# Altium PCB LIN_break2.PcbDoc
Units mm, origin at the board's own origin, x right, y up, seen from the top; angles counter-clockwise.
Board outline 30 x 50 mm, 2 copper layers (L1, L2), stack 0.93 mm thick; 26 components, 21 nets, 113 pads, 31 vias.
Unrouted connection lines stored in the file: 5.
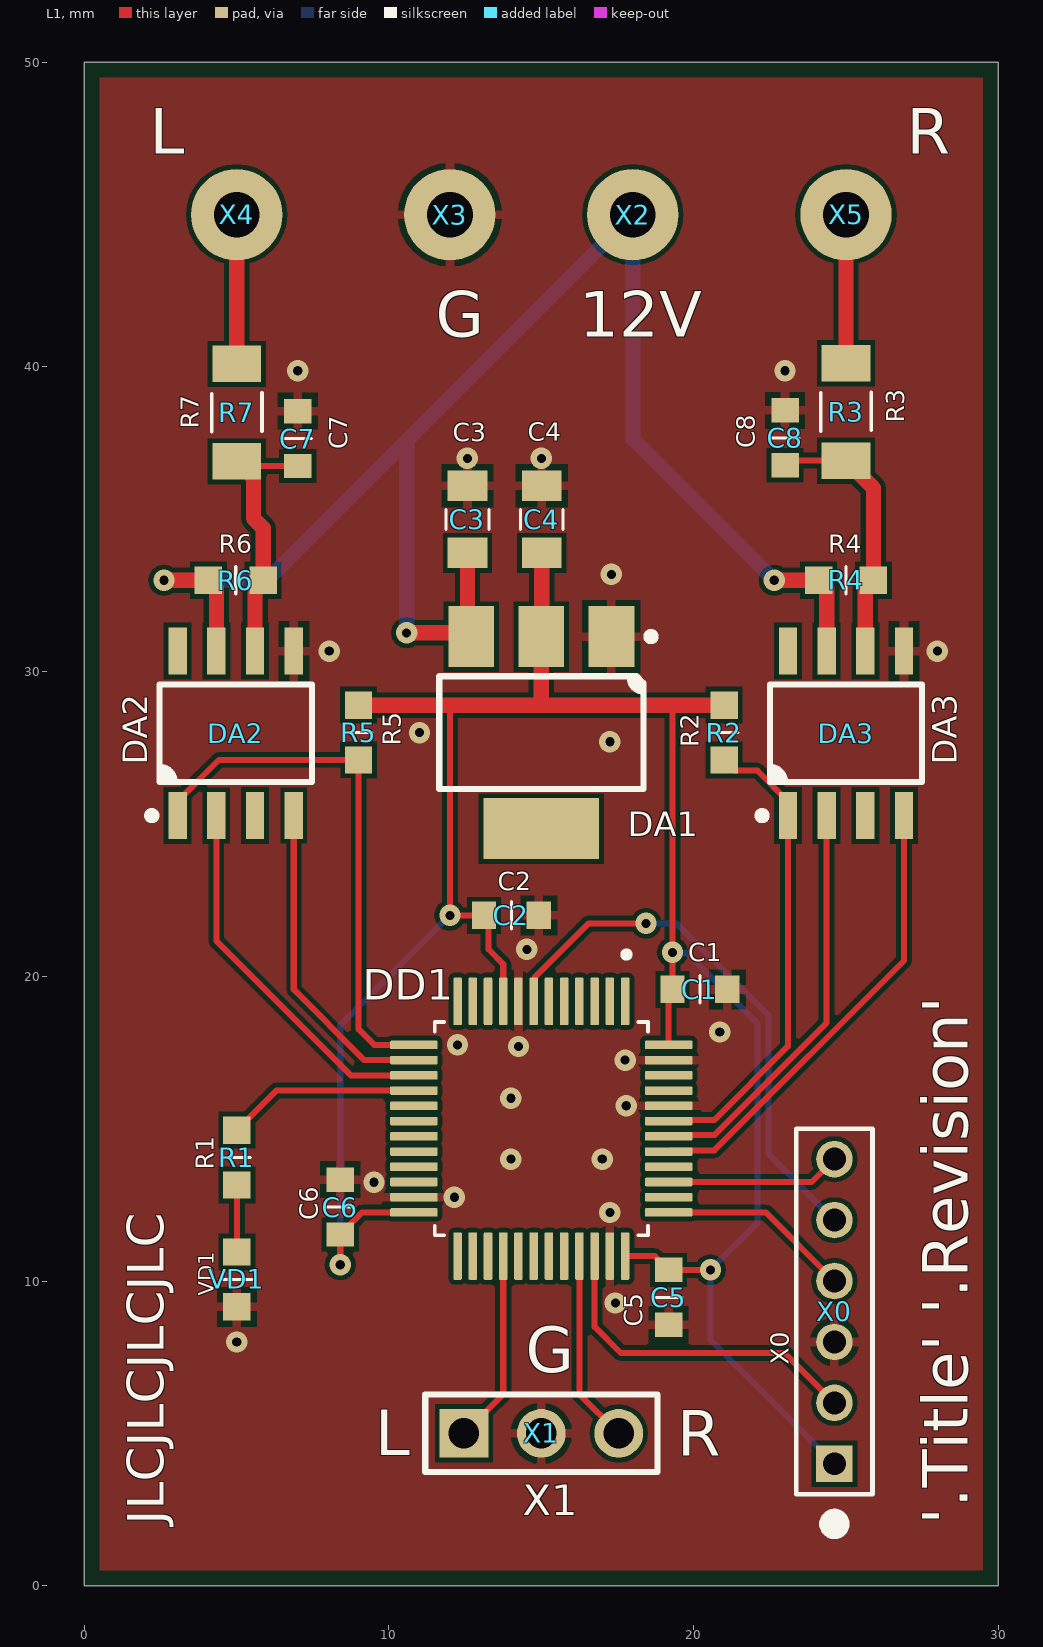
[diagram p0: L1 view]
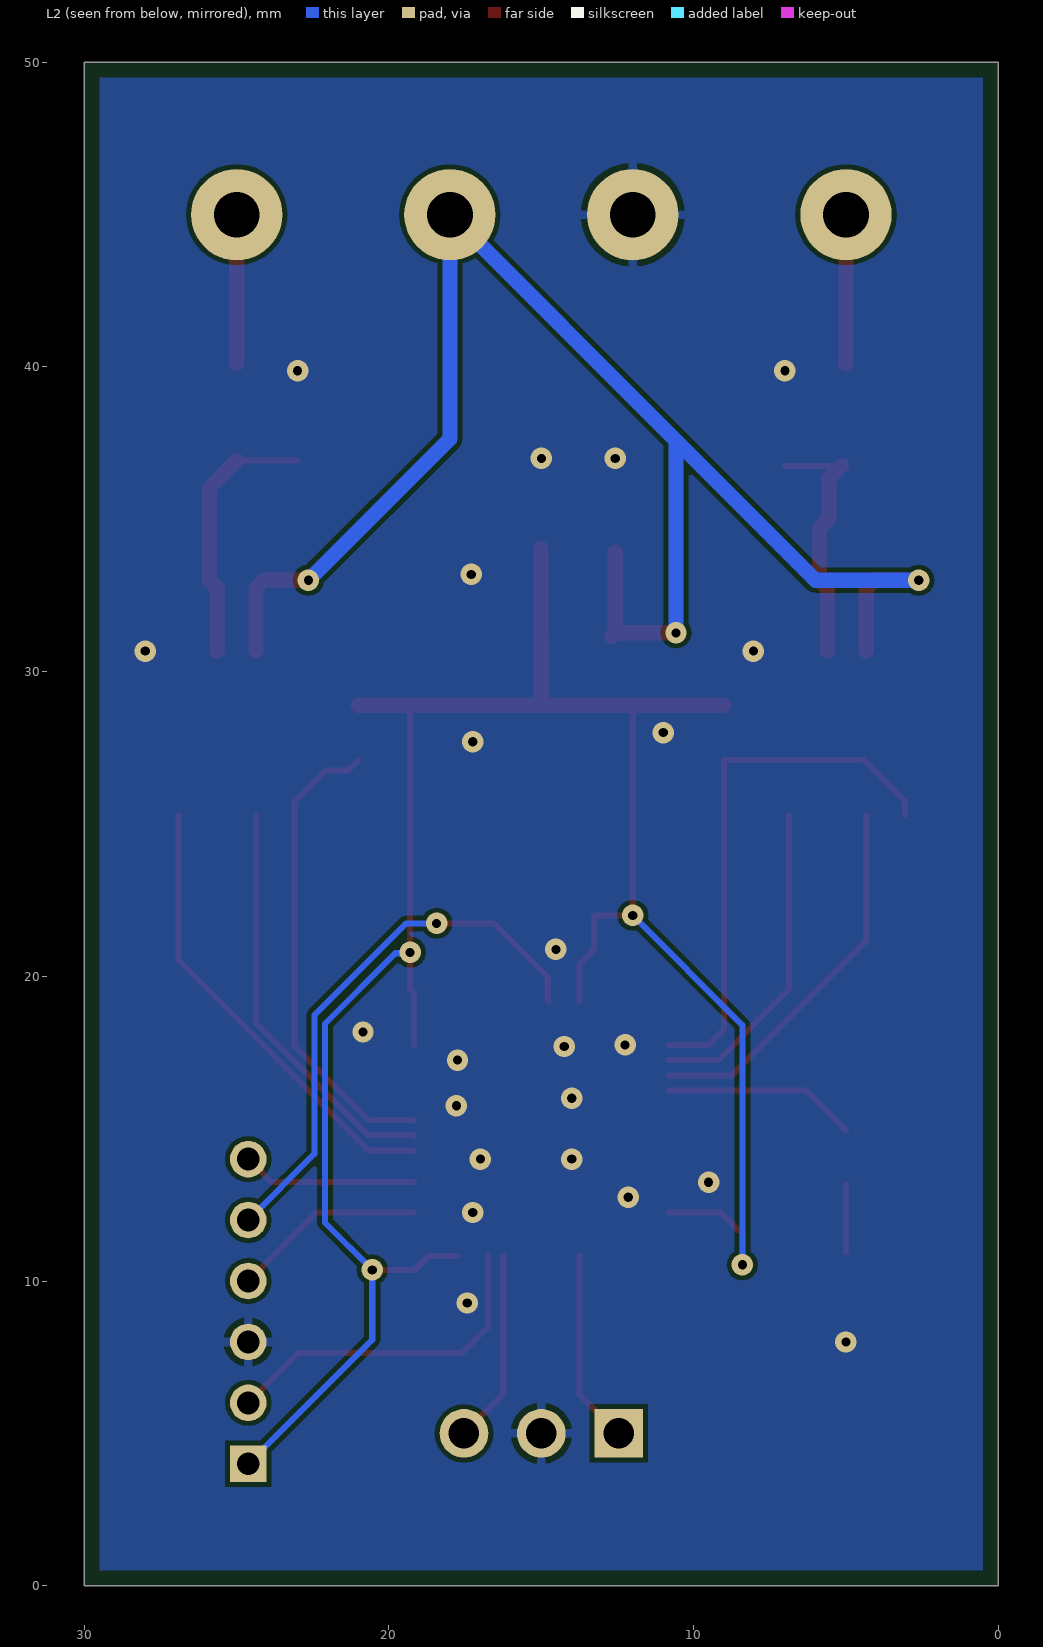
[diagram p1: L2 view, seen from below]
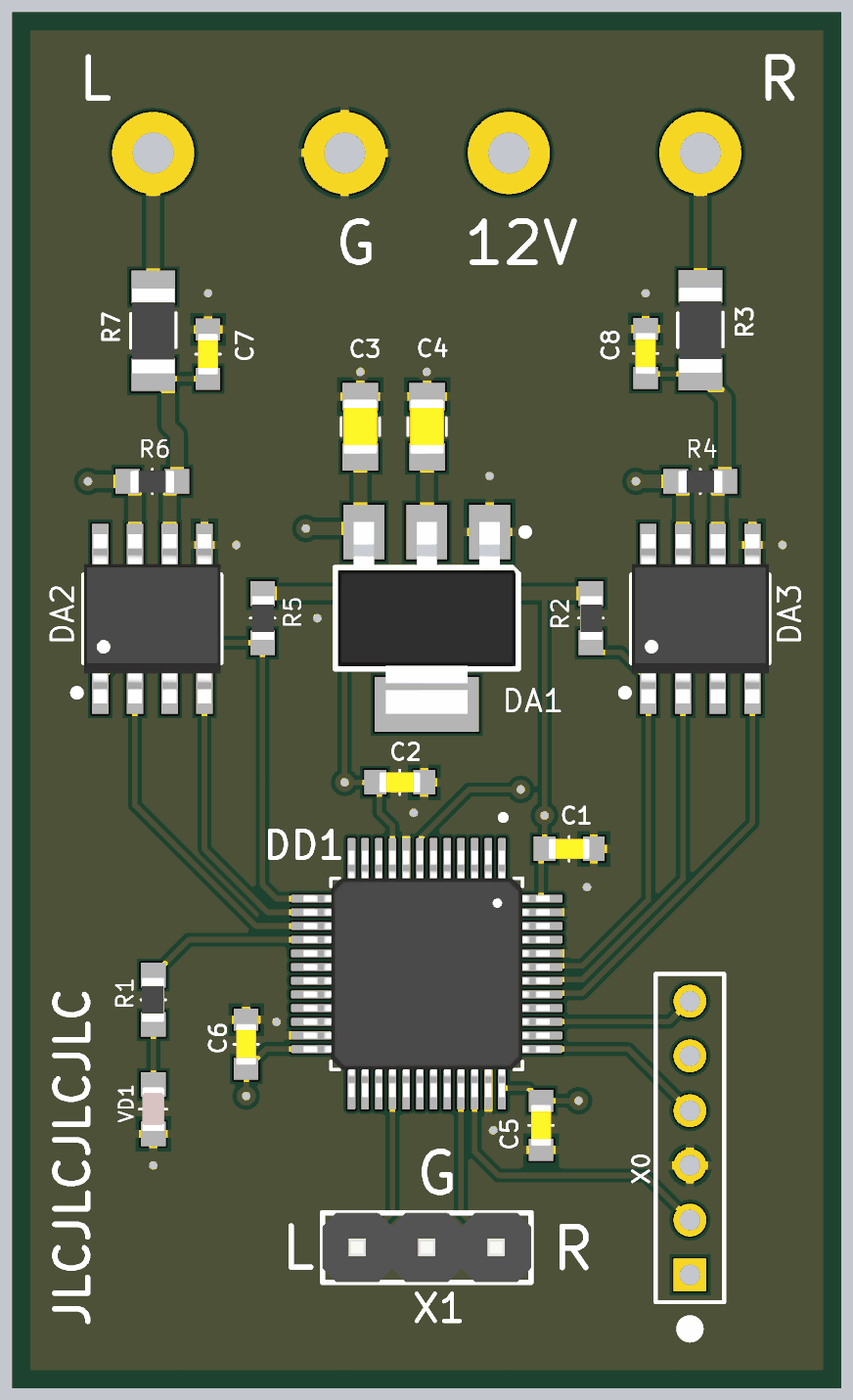
[diagram p2: 3D render of the assembled board from above, using the file's embedded part models]

## Layer stack, top to bottom
Top Solder: solder mask 0.03, Solder Resist, Dk 3.5
L1: signal copper 0.015
Core: core 0.9, FR-4, Dk 4.2
L2: signal copper 0.015
Bot Solder: solder mask 0.03, Solder Resist, Dk 3.5

## Board outline
0,0 0,50 30,50 30,0

## Design rules (kind name [scope] priority, off if disabled: settings)
BoardOutlineClearance KeepoutBoardOutline [(ObjectKind = 'Track') And (Keepout = 'True')] p1: gap=0 ignorepadtopadclearanceinfootprint=FALSE
BoardOutlineClearance IDC-20F [HasFootprint('IDC-20F-EDGE')] p2: gap=0 ignorepadtopadclearanceinfootprint=FALSE
BoardOutlineClearance BoardOutlineClearanceAll [All] p3: gap=0.5 ignorepadtopadclearanceinfootprint=FALSE
Clearance ClearanceNetA1_1 [InNet('NetA1_1')] p1 off: gap=0.15 ignorepadtopadclearanceinfootprint=FALSE except(0.2: Arc-Fill Arc-Poly Arc-Region Track-Fill Track-Poly Track-Region)
Clearance ClearanceTopSilk [OnLayer('Top Silk') vs OnLayer('L1')] p2: gap=0.15 ignorepadtopadclearanceinfootprint=FALSE except(0: Arc-Hole Track-Hole SMDPad-Hole THPad-Hole Via-Hole Fill-Hole Poly-Hole Region-Hole Text-Hole)
Clearance ClearanceBalun [HasFootprint('BALF-NRG-01D3')] p3: gap=0.1 ignorepadtopadclearanceinfootprint=FALSE except(0: Arc-Hole Track-Hole SMDPad-Hole THPad-Hole Via-Hole Fill-Hole Poly-Hole Region-Hole Text-Hole) // BALF-NRG-01D3
Clearance ClearanceBalun_CC112X [HasFootprint('BALF-112X-01D3')] p4: gap=0.1 ignorepadtopadclearanceinfootprint=FALSE except(0: Arc-Hole Track-Hole SMDPad-Hole THPad-Hole Via-Hole Fill-Hole Poly-Hole Region-Hole Text-Hole) // BALF-NRG-01D3
Clearance ClearancePolygonANT [InNet('ANT') vs InPoly] p5: gap=0.45 ignorepadtopadclearanceinfootprint=FALSE except(0: Arc-Hole Track-Hole SMDPad-Hole THPad-Hole Via-Hole Fill-Hole Poly-Hole Region-Hole Text-Hole)
Clearance Wire_Jumpers [HasFootprint('WIRE')] p6: gap=0.01 ignorepadtopadclearanceinfootprint=FALSE except(0: Arc-Hole Track-Hole SMDPad-Hole THPad-Hole Via-Hole Fill-Hole Poly-Hole Region-Hole Text-Hole) // Pour over wire jumpers
Clearance VD [All vs HasFootprint('DPF(S-PX2SON-N6)')] p7: gap=0.1 ignorepadtopadclearanceinfootprint=FALSE except(0: Arc-Hole Track-Hole SMDPad-Hole THPad-Hole Via-Hole Fill-Hole Poly-Hole Region-Hole Text-Hole) // For small diods (ECD protection)
Clearance L1 [OnLayer('L1')] p8: gap=0.15 ignorepadtopadclearanceinfootprint=FALSE except(0: Arc-Hole Track-Hole SMDPad-Hole THPad-Hole Via-Hole Fill-Hole Poly-Hole Region-Hole Text-Hole)
Clearance L2 [OnLayer('L2')] p9: gap=0.15 ignorepadtopadclearanceinfootprint=FALSE except(0: Arc-Hole Track-Hole SMDPad-Hole THPad-Hole Via-Hole Fill-Hole Poly-Hole Region-Hole Text-Hole)
ComponentClearance PowerConnector [(ObjectKind = '3D Body') And (Identifier = '039012040')] p1: gap=0 collisioncheckmode=3 verticalgap=0 showdistances=FALSE
ComponentClearance MezzanineConnectors [InComponent('X7') or InComponent('X8') vs (ObjectKind = '3D Body') And (Identifier = 'mezzanine')] p2: gap=0 collisioncheckmode=3 verticalgap=0 showdistances=FALSE
ComponentClearance [(ObjectKind = '3D Body') And (Identifier = '039012040')] p3: gap=0 collisioncheckmode=3 verticalgap=0 showdistances=TRUE
ComponentOrientations [All] p1: allowedrotations=32
DiffPairsRouting [All] p1: maxlimit=0.4 minlimit=0.4 mostfreqgap=0.4 toplayer_minwidth=0.15 toplayer_maxwidth=0.3 toplayer_prefwidth=0.3 bottomlayer_minwidth=0.15 bottomlayer_maxwidth=0.3 bottomlayer_prefwidth=0.3 maxuncoupledlength=12.7
HoleSize [All] p1: absolutevalues=TRUE maxlimit=3 minlimit=0.3 maxpercent=80.000 minpercent=20.000
HoleToHoleClearance [All] p1: gap=0.1 allowstackedmicrovias=TRUE
MatchedLengths USB2 [InNetClass('USB2')] p1: tolerance=1 checknetsindiffpair=TRUE checkdiffpairvsdiffpair=FALSE checkxsignals=FALSE checkothers=FALSE
MatchedLengths USB1 [InNetClass('USB1')] p2: tolerance=1 checknetsindiffpair=TRUE checkdiffpairvsdiffpair=FALSE checkxsignals=FALSE checkothers=FALSE
MatchedLengths BLE_SPI [InNetClass('BLE_SPI')] p3: tolerance=1 checknetsindiffpair=TRUE checkdiffpairvsdiffpair=FALSE checkxsignals=FALSE checkothers=FALSE
MatchedLengths ACEEL_SPI [InNetClass('ACC_SPI')] p4: tolerance=1 checknetsindiffpair=TRUE checkdiffpairvsdiffpair=FALSE checkxsignals=FALSE checkothers=FALSE
MatchedLengths DEBUG_Lengths [InNetClass('DEBUG')] p5: tolerance=1 checknetsindiffpair=TRUE checkdiffpairvsdiffpair=FALSE checkxsignals=FALSE checkothers=FALSE
MinimumAnnularRing MinimumAnnularRing_1 [(ObjectKind = 'Via') And (AsMM(PadXSize_TopLayer) = 0.4)] p1: minimumring=0
MinimumAnnularRing [(ObjectKind = 'Via') And (AsMM(PadXSize_TopLayer) <> 0.4)] p2: minimumring=0.2
MinimumSolderMaskSliver [All] p1 off: minsoldermaskwidth=0.148
NetAntennae Keepout [(ObjectKind = 'Track') And (Keepout = 'True')] p1: netantennaetolerance=100
PlaneClearance [All] p1: clearance=0.15
PlaneConnect [All] p1: planeconnectstyle=Relief reliefexpansion=0.5 reliefentries=4 reliefconductorwidth=0.25 reliefairgap=0.15
PolygonConnect PolygonConnect_Vias [(ObjectKind = 'Via')] p1: connectstyle=Direct reliefconductorwidth=0.254 reliefentries=4 polygonreliefangle="90 Angle" airgapwidth=0.254
PolygonConnect PolygonConnect_L2 [OnLayer('L2')] p2: connectstyle=Relief reliefconductorwidth=0.3 reliefentries=4 polygonreliefangle="90 Angle" airgapwidth=0.2
PolygonConnect PolygonConnect_L1 [OnLayer('L1')] p3: connectstyle=Relief reliefconductorwidth=0.3 reliefentries=4 polygonreliefangle="90 Angle" airgapwidth=0.2
RoutingCorners [All] p1: cornerstyle=45-Degree minsetback=2.5 maxsetback=2.5
RoutingVias [All] p1: holewidth=0.3 width=0.7 viastyle="Through Hole" minholewidth=0.3 minwidth=0.4 maxholewidth=0.3 maxwidth=0.7
SMDEntry [All] p1: side=TRUE corner=TRUE anyangle=TRUE
SMDToCorner [All] p1: distance=0
SMDToPlane [All] p1: distance=0
ShortCircuit NoNet [Not InAnyNet vs Not InAnyNet] p1: allowed=TRUE
SilkToSilkClearance [All] p1: silktosilkclearance=0
SilkToSolderMaskClearance [IsPad] p1: minsilkscreentomaskgap=0.02 clearancetoexposedcopper=TRUE
SolderMaskExpansion SolderMaskExpansion_Edge [OnLayer('Board')] p1: expansion=0.5 istentingtop=FALSE
SolderMaskExpansion SolderMaskKeepOut [OnLayer('Keepout')] p2: expansion=0.25 istentingtop=FALSE
SolderMaskExpansion [All] p3: expansion=0.075 istentingtop=FALSE
UnRoutedNet "Without GNDs" [not InNetClass('GND')] p1:
UnRoutedNet [All] p2 off:
Width "VD ESD" [InComponent('VD1')] p1: maxlimit=0.1 minlimit=0.1 preferedwidth=0.1
Width Width_GNDB [InNet('GNDB')] p2: maxlimit=0.254 minlimit=0.23 preferedwidth=0.23
Width Width_+V_BLE [InNet('+V_BLE')] p3: maxlimit=0.3 minlimit=0.23 preferedwidth=0.23
Width Width_GND [InNetClass('GND')] p4: maxlimit=5 minlimit=0.15 preferedwidth=0.3
Width Width_VDD [InNetClass('POWER')] p5: maxlimit=5 minlimit=0.15 preferedwidth=0.3
Width [All] p6: maxlimit=5 minlimit=0.15 preferedwidth=0.2
17 further rules are at their usual default settings.

## Components (designator, comment, footprint, x,y, rotation, side; value= is the part's Value field where it differs from the comment)
C1 "1u" C0603 20.205,19.569 r0 top
C2 "1u" C0603 14.016,22 r0 top
C3 "10u" C0805 12.575,35 r90 top
C4 "10u" C0805 15.012,35 r90 top
C5 "1u" C0603 19.18,9.465 r270 top
C6 "1u" C0603 8.4,12.427 r90 top
C7 "220p" C0603 7.005,37.65 r90 top
C8 "220p" C0603 23,37.675 r90 top
DA1 "=Value" AMS1117-3.3 15,28 r270 top
DA2 "SN65HVDA195" "TI-SOIC8 D" 4.969,27.975 r90 top value=LIN
DA3 "SN65HVDA195" "TI-SOIC8 D" 25,27.975 r90 top value=LIN
DD1 "STM32F103C4" ST-LQFP48 15,15 r270 top
R1 "1k" R0603 5.005,14.052 r270 top
R2 "10k" R0603 21,28 r90 top
R3 "22" R1206 25,38.525 r90 top
R4 "10k" R0603 25,33 r0 top
R5 "10k" R0603 9,28 r90 top
R6 "10k" R0603 4.969,33 r0 top
R7 "22" R1206 5.005,38.5 r90 top
VD1 "Red" "LTST-C193 RED" 5.005,10.052 r90 top
X0 "STM32_SMT_DEBUG_JLINK" STM32_DEBUG_6x1_2mm_pitch 24.62,4 r90 top value="SWD TH"
X1 "PLS-3" PLS-3 12.46,5 r0 top
X2 "1-pin_round NB" Hole-1-1.6 18,45 r90 top value=Hole-1-1.6
X3 "1-pin_round NB" Hole-1-1.6 12,45 r90 top value=Hole-1-1.6
X4 "1-pin_round NB" Hole-1-1.6 5,45 r180 top value=Hole-1-1.6
X5 "1-pin_round NB" Hole-1-1.6 25,45 r180 top value=Hole-1-1.6

## Footprints (in the part's own frame and the unit in brackets; to place one, negate y for a bottom-side part, rotate by r counter-clockwise, add the part's x,y. Pads: shape width x height; smd on the part's side, far side on the other; paste and mask are expansions set on the pad)
AMS1117-3.3 [mm] "SOT223, 4-Leads, Body 6.50x7.00mm (avg), Pitch 2.30mm, IPC Medium Density"
  rect 2x1.5 smd: 1(-3.15,2.3) 2(-3.15,0) 3(-3.15,-2.3)
  rect 2x3.8 smd: 4(3.15,0)
  silkscreen extent -3.27,-3.35 1.85,3.73, body extent -3.52,-3.25 3.5,3.25, height 1.8
C0603 [mm]
  rect 0.8x0.9 smd: 1(-0.9,0) 2(0.9,0)
  silkscreen extent 0,-0.45 0,0.45, body extent -0.76,-0.38 0.76,0.38, height 0.76
C0805 [mm]
  rect 1x1.3 smd: 1(-1.1,0) 2(1.1,0)
  silkscreen extent -0.33,-0.7 0.33,0.7, body extent -1.02,-0.63 1.02,0.64, height 1.27
Hole-1-1.6 [mm]
  round 3 hole 1.5 mask+0.075: 1(0,0)
"LTST-C193 RED" [mm]
  rect 0.9x0.9 smd: 1(-0.9,0) 2(0.9,0)
  silkscreen extent 0,-0.5 0,0.51, body extent -0.8,-0.4 0.8,0.4, height 0.36
PLS-3 [mm]
  rect 1.6x1.6 hole 1 paste+1 mask+0.1: 1(0,0)
  round 1.6 hole 1 paste+1 mask+0.1: 2(2.54,0) 3(5.08,0)
  silkscreen extent -1.27,-1.27 6.35,1.27, body extent -1.27,-1.27 6.35,1.27, height 8.54
R0603 [mm]
  rect 0.9x0.9 smd: 1(-0.9,0) 2(0.9,0)
  silkscreen extent 0,-0.45 0,0.45, body extent -0.8,-0.42 0.8,0.4, height 0.46
R1206 [mm]
  rect 1.2x1.6 smd: 1(-1.6,0) 2(1.6,0)
  silkscreen extent -0.63,-0.82 0.65,0.82, body extent -1.55,-0.77 1.55,0.78, height 0.55
ST-LQFP48 [mm]
  rrect25% 1.56x0.28 smd: 1(-4.18,2.75) 2(-4.18,2.25) 3(-4.18,1.75) 4(-4.18,1.25) 5(-4.18,0.75) 6(-4.18,0.25) 7(-4.18,-0.25) 8(-4.18,-0.75) 9(-4.18,-1.25) 10(-4.18,-1.75) 11(-4.18,-2.25) 12(-4.18,-2.75) 25(4.18,-2.75) 26(4.18,-2.25) 27(4.18,-1.75) 28(4.18,-1.25) 29(4.18,-0.75) 30(4.18,-0.25) 31(4.18,0.25) 32(4.18,0.75) 33(4.18,1.25) 34(4.18,1.75) 35(4.18,2.25) 36(4.18,2.75)
  rrect25% 0.28x1.56 smd: 13(-2.75,-4.18) 14(-2.25,-4.18) 15(-1.75,-4.18) 16(-1.25,-4.18) 17(-0.75,-4.18) 18(-0.25,-4.18) 19(0.25,-4.18) 20(0.75,-4.18) 21(1.25,-4.18) 22(1.75,-4.18) 23(2.25,-4.18) 24(2.75,-4.18) 37(2.75,4.18) 38(2.25,4.18) 39(1.75,4.18) 40(1.25,4.18) 41(0.75,4.18) 42(0.25,4.18) 43(-0.25,4.18) 44(-0.75,4.18) 45(-1.25,4.18) 46(-1.75,4.18) 47(-2.25,4.18) 48(-2.75,4.18)
  silkscreen extent -5.81,-3.5 3.5,3.5, body extent -4.5,-4.5 4.5,4.5, height 1.66
STM32_DEBUG_6x1_2mm_pitch [mm]
  rect 1.2x1.2 hole 0.75 mask+0.06: 1(0,0)
  round 1.2 hole 0.75 mask+0.06: 2(2,0) 3(4,0) 4(6,0) 5(8,0) 6(10,0)
  silkscreen extent -1,-1.25 11,1.25
"TI-SOIC8 D" [mm]
  rect 1.55x0.6 smd: 1(-2.7,1.905) 2(-2.7,0.635) 3(-2.7,-0.635) 4(-2.7,-1.905) 5(2.7,-1.905) 6(2.7,-0.635) 7(2.7,0.635) 8(2.7,1.905)
  silkscreen extent -2.82,-2.5 1.6,2.88, body extent -3.1,-2.5 3.1,2.5, height 1.76

## Part data
C1 C2 C5 C6: library part "C0603 1u 10V X6S 105°C ±20%", "General  ceramic capacitor", LCSC Part #=C15849, Package=C0603, Part Number=GRM185C81A105ME36#, Temperature=105°C, Tolerance=±20%, Voltage=10V, Component Name="C0603 1u 10V X6S 105°C ±20%", Pins=2, Vendor=Murata
C3 C4: library part "C0805 10u 10V X6S 105°C ±10%", "General  ceramic capacitor", LCSC Part #=C1046, Package=C0805, Part Number=GRM21BC81A106KE18#, Temperature=105°C, Tolerance=±10%, Voltage=10V, Component Name="C0805 10u 10V X6S 105°C ±10%", Pins=2, Vendor=Murata
C7 C8: library part "C0603 220p 100V X7R 125°C ±20%", "General  ceramic capacitor", Dielectric=X7R, Package=C0603, Part Number=GRM188R72A221MA01#, Temperature=125°C, Tolerance=±20%, Voltage=100V, Component Name="C0603 220p 100V X7R 125°C ±20%", HelpURL=https://psearch.en.murata.com/capacitor/result/smd/?pid=GRM188R72A221MA01#, Pins=2, Vendor=Murata
DA1: library part AMS1117-3.3, "LDO ADJ 0.8mA", LCSC Part #=C426566, Package=SOT-223, Component Name=AMS1117-3.3, HelpURL=https://lcsc.com/product-detail/Linear-Voltage-Regulators-LDO_Slkor-SLKORMICRO-Elec-AMS1117-3-3_C426566.html, Part Number=AMS1117-3.3, Pins=4
DA2 DA3: "LIN driver", LCSC Part #=C140290, Package="SOIC – D", Part Number=SN65HVDA195QDRQ1, Component Name=SN65HVDA195, HelpURL=http://www.ti.com/lit/ds/symlink/sn65hvda195-q1.pdf, Pins=8, Vendor=TI
DD1: "16K Flash, 48 pins", Package=LQFP48, Component Name=STM32F103C4, HelpURL=https://www.st.com/en/microcontrollers-microprocessors/stm32f103c6.html, Part Number=STM32F103C4, Pins=100, Vendor=ST
R1 R2 R4 R5 R6: library part "R0603 1k ±1% E24", "Thick Film Chip Resistor - CR Series", LCSC Part #=C21190, Package=R0603, Part Number=CR-03FL7----1k, Tolerance=±1%, Voltage=75V, Component Name="R0603 1k ±1% E24", Pins=2, Vendor=Viking
  R1: HelpURL=https://www.viking.com.tw/en/search/index.html?f%5Bname_model%5D=CR-03FL7----1k&type=product
R3 R7: library part "R1206 22 1%", "1/4W 200V", Package=R1206, Part Number=CR-06FL5--22R0, Component Name="R1206 22 1%", Pins=2, Vendor=Viking
VD1: library part "0603 0h35 5mA RED KRKT", "TopView Single Color Chip LED", LCSC Part #=C157741, Package="0603 0h35", Part Number=LTST-C193KRKT-5A, Component Name="0603 0h35 5mA RED KRKT", HelpURL=https://lcsc.com/product-detail/Light-Emitting-Diodes-LED_Lite-On-LTST-C193KRKT-5A_C157741.html, Pins=2, Vendor=Lite-On, Wavelength="631 @ 5mA"
X0: library part Debug6SMT_2mm, "Trace-Asynchronous_SW", Package=TH, Component Name=Debug6SMT_2mm, Pins=6
X2 X3 X4 X5: library part Hole-1-1.6, Component Name=Hole-1-1.6, Pins=1, Price=0
X1: Component Name=PLS-3, Part Number=PLS-3, Pins=3

## Via types
v1: diameter 0.7, hole 0.3, L1 to L2, tented both sides, 31 vias

## Nets (pads, with @x,y where several pads share a name; then routed paths per layer and width w, separated by ;. In a path a pad name is that pad's centre, name@x,y a point inside that pad or via, vN(x,y) a via of type N, cw(c..) or ccw(c..) an arc to the next point about the centre after c; other vN are vias at no path point)
3V: C1.1 C2.1 C4.1 C5.1 C6.1 DA1.2 DD1.9 DD1.24 DD1.36 DD1.48 R2.2 R5.2 X0.1 | length 80.5
  L1 w0.2: v1(8.4,10.535) 8.4,11.677 8.55,11.677 9.123,12.25 DD1.24 ; 12,28.9 v1(12,22) 13.266,22 13.266,20.886 13.75,20.402 DD1.9 ; DD1.36 18.713,10.82 ; DD1.48 19.18,19.444 C1.1 19.305,28.9 ; v1(20.55,10.365) C5.1 ; 18.713,10.82 18.725,10.82 C5.1 ; 18.713,10.82 18.83,10.703 18.83,10.665 19.13,10.365 C5.1
  L1 w0.5: R5.2 12,28.9 15,28.9 ; C4.1@15.012,34.05 15.012,31.162 DA1.2 15,28.9 ; R2.2 19.305,28.9 15,28.9
  L2 w0.2: v1(8.4,10.535) 8.4,18.4 v1(12,22) ; v1(19.305,20.788) 19.337,20.757 19.793,20.757 22.1,18.45 22.1,11.915 v1(20.55,10.365) 20.55,8.07 X0.1
+12V: C3.1 DA1.3 DA2.7 DA3.7 R4.1 R6.1 X2.1 | length 53.2
  L1 w0.5: v1(2.614,33) R6.1 4.334,32.735 DA2.7 ; v1(10.58,31.275) DA1.3@12.575,31.275 ; C3.1@12.575,33.917 DA1.3@12.575,31.275 ; DA1.3 DA1.3@12.575,31.275 ; v1(22.645,33) R4.1 24.365,32.735 DA3.7
  L2 w0.5: v1(2.614,33) 6,33 10.58,37.58 ; v1(10.58,31.275) 10.58,37.58 ; v1(22.645,33) 18,37.645 X2.1 10.58,37.58
GND: C1.2 C2.2 C3.2 C4.2 C5.2 C6.2 C7.2 C8.2 DA1.1 DA2.5 DA3.5 DD1.8 DD1.23 DD1.35 DD1.44 DD1.47 VD1.1 X0.3 X1.2 X3.1
  other v1: 5.005,8 17.429,9.28 17.25,12.25 12.145,12.75 9.51,13.244 14,14 17,14 17.788,15.75 14,16 17.75,17.25 14.25,17.7 12.25,17.75 20.855,18.171 14.524,20.886 17.25,27.7 11,28 8.04,30.675 28,30.675 17.3,33.195 12.573,37 15,37 7.005,39.875 23,39.875
LED: DD1.16 R1.1 | length 6.4
  L1 w0.2: R1.1 6.303,16.25 DD1.16
LIN_EN1: DA2.2 DD1.15 | length 12.4
  L1 w0.2: DA2.2 4.334,21.162 8.747,16.75 DD1.15
LIN_EN2: DA3.2 DD1.42 | length 13.5
  L1 w0.2: DD1.42 19.22,14.79 20.68,14.79 24.365,18.475 DA3.2
LIN_L: R7.2 X4.1 | length 4.9
  L1 w0.5: X4.1 5,40.105 R7.2
LIN_R: R3.2 X5.1 | length 4.9
  L1 w0.5: R3.2 X5.1
LIN_RXD1: DA2.1 DD1.13 R5.1 | length 17.8
  L1 w0.2: DA2.1 3.064,25.75 4.414,27.1 R5.1 9,18.26 9.51,17.75 DD1.13
LIN_RXD2: DA3.1 DD1.43 R2.1 | length 15.6
  L1 w0.2: DD1.43 19.22,15.29 20.685,15.29 23.095,17.7 DA3.1 23.095,25.75 22.095,26.75 21.35,26.75 R2.1
LIN_TXD1: DA2.4 DD1.14 | length 10.6
  L1 w0.2: DA2.4 6.874,19.569 9.194,17.25 DD1.14
LIN_TXD2: DA3.4 DD1.41 | length 15.1
  L1 w0.2: DD1.41 19.22,14.29 20.675,14.29 26.905,20.52 DA3.4
NetC7_1: C7.1 DA2.6 R6.2 R7.1 | length 8.5
  L1 w0.2: R7.1 5.155,36.75 C7.1
  L1 w0.5: R7.1@5.155,36.75 5.555,36.35 5.555,35.032 5.869,34.718 R6.2 5.604,32.735 DA2.6
NetC8_1: C8.1 DA3.6 R3.1 R4.2 | length 8.7
  L1 w0.2: C8.1@23,36.925 R3.1
  L1 w0.5: R3.1 25.9,36.025 R4.2 25.635,32.735 DA3.6
NetR1_2: R1.2 VD1.2 | length 2.2
  L1 w0.2: VD1.2 R1.2
NRST: DD1.7 X0.5 | length 18.1
  L1 w0.2: DD1.7 14.79,19.22 14.79,19.973 16.556,21.739 v1(18.435,21.739)
  L2 w0.2: v1(18.435,21.739) 19.434,21.739 22.45,18.723 22.45,14.17 X0.5
OUT_L: DD1.28 X1.1 | length 6.4
  L1 w0.2: X1.1 13.75,6.29 DD1.28
OUT_R: DD1.33 X1.3 | length 6.4
  L1 w0.2: DD1.33 16.25,6.29 X1.3
SWDCLK: DD1.37 X0.4 | length 6.4
  L1 w0.2: DD1.37 22.37,12.25 X0.4
SWDIO: DD1.34 X0.2 | length 11.2
  L1 w0.2: DD1.34 16.75,8.497 17.614,7.633 22.987,7.633 X0.2
SWO: DD1.39 X0.6 | length 5.8
  L1 w0.2: DD1.39 23.87,13.25 X0.6
pads on no net: DA1.4 DA2.3 DA2.8 DA3.3 DA3.8 DD1.1 DD1.2 DD1.3 DD1.4 DD1.5 DD1.6 DD1.10 DD1.11 DD1.12 DD1.17 DD1.18 DD1.19 DD1.20 DD1.21 DD1.22 DD1.25 DD1.26 DD1.27 DD1.29 DD1.30 DD1.31 DD1.32 DD1.38 DD1.40 DD1.45 DD1.46

## Polygon pours and split planes (outlines as drawn)
GND on L2 "L2-No Net" (solid, pour order 0): -5,50 35,50 35,0 -5,0
GND on L1 "L1-No Net" (solid, pour order 4): -5,50 35,50 35,0 -5,0

## Silkscreen, mask and mechanical layers (free items; w line width, h text height)
Top Overlay:
  circle w0.5: c24.62,2.026 r0.25
  text "L" at 2.143,47 h1.5
  text "R" at 27,47 h1.5
  text "G" at 11.529,41 h1.5
  text "12V" at 16.25,41 h1.5
  text "G" at 14.496,7 h1.5
  text "L" at 9.556,4.275 h1.5
  text "R" at 19.467,4.259 h1.5
  text "JLCJLCJLCJLC" at 2.614,2 h1.2 r90
  text "'.Title' '.Revision'" at 29,2 h1.5 r90
Board:
  the board outline again, w0.3